# Altium PCB PCB.PcbDoc
Units mm, origin at the board's own origin, x right, y up, seen from the top; angles counter-clockwise.
Board outline 60.71 x 40 mm, 4 copper layers (Top Layer, GND, Power, Bottom Layer), stack 2.077 mm thick; 18 components, 19 nets, 85 pads, 201 vias.
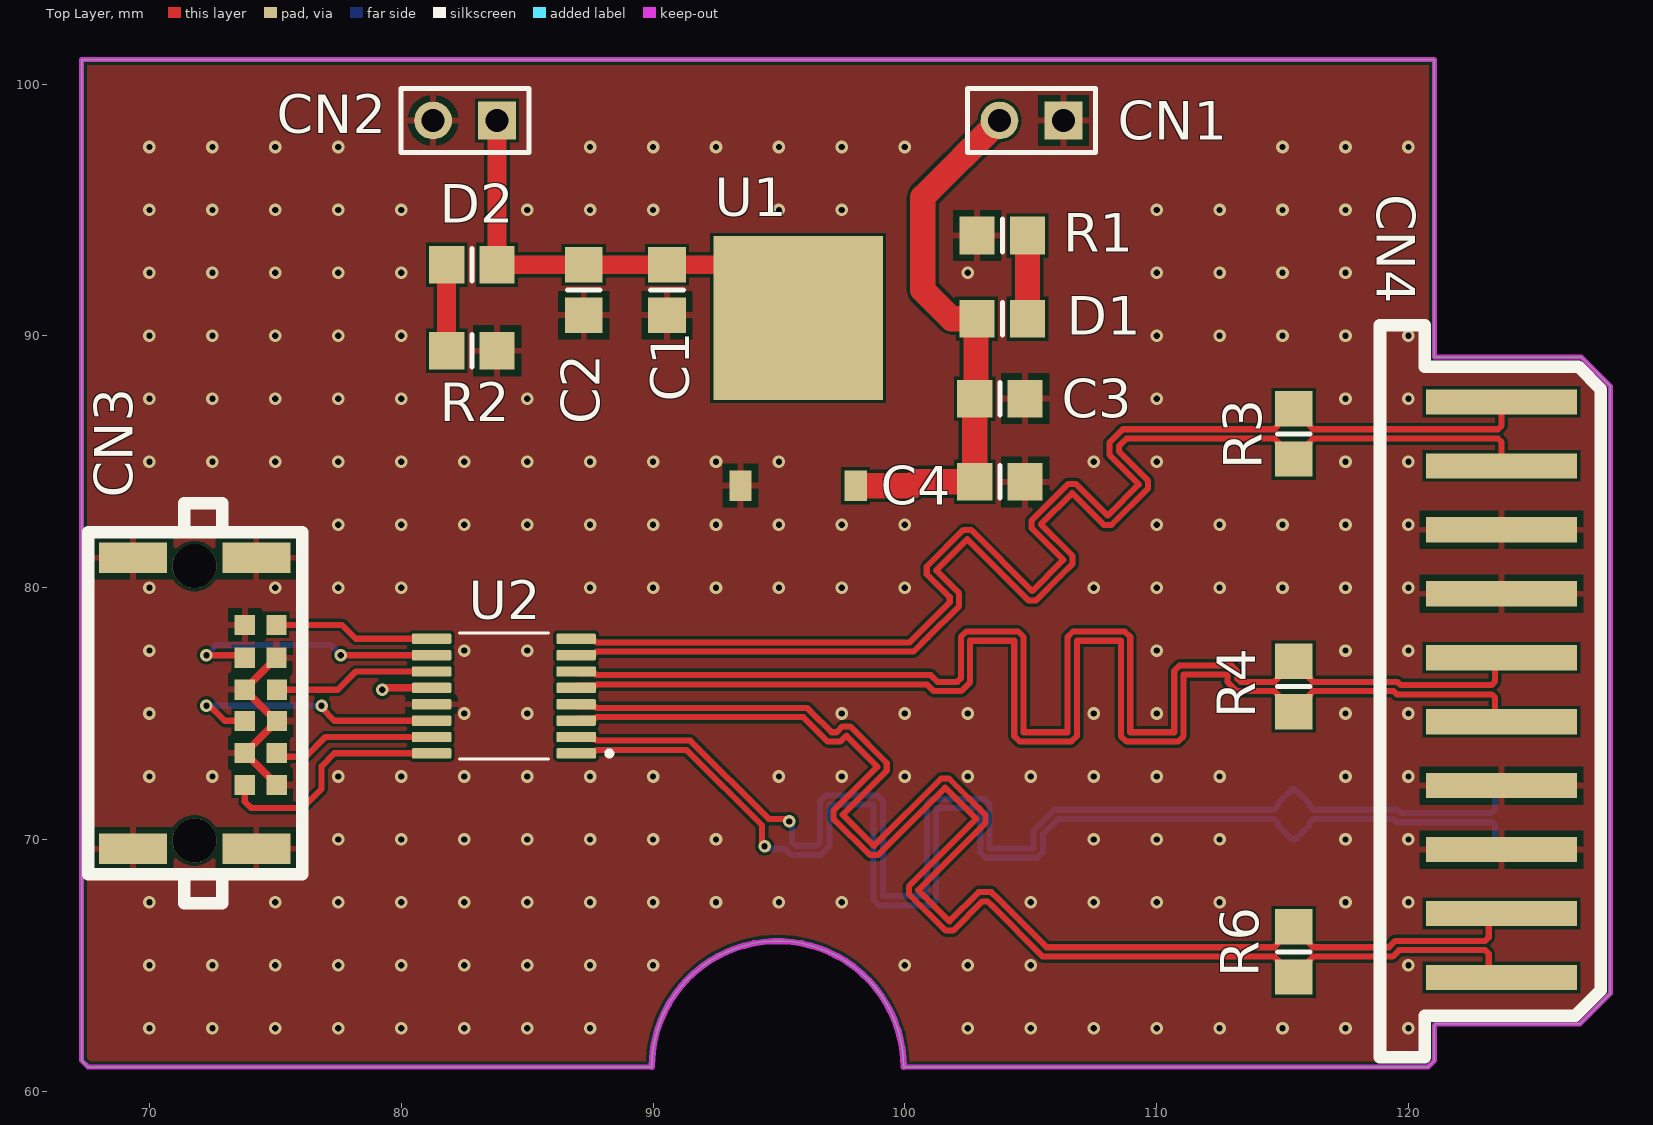
[diagram p0: Top Layer view]
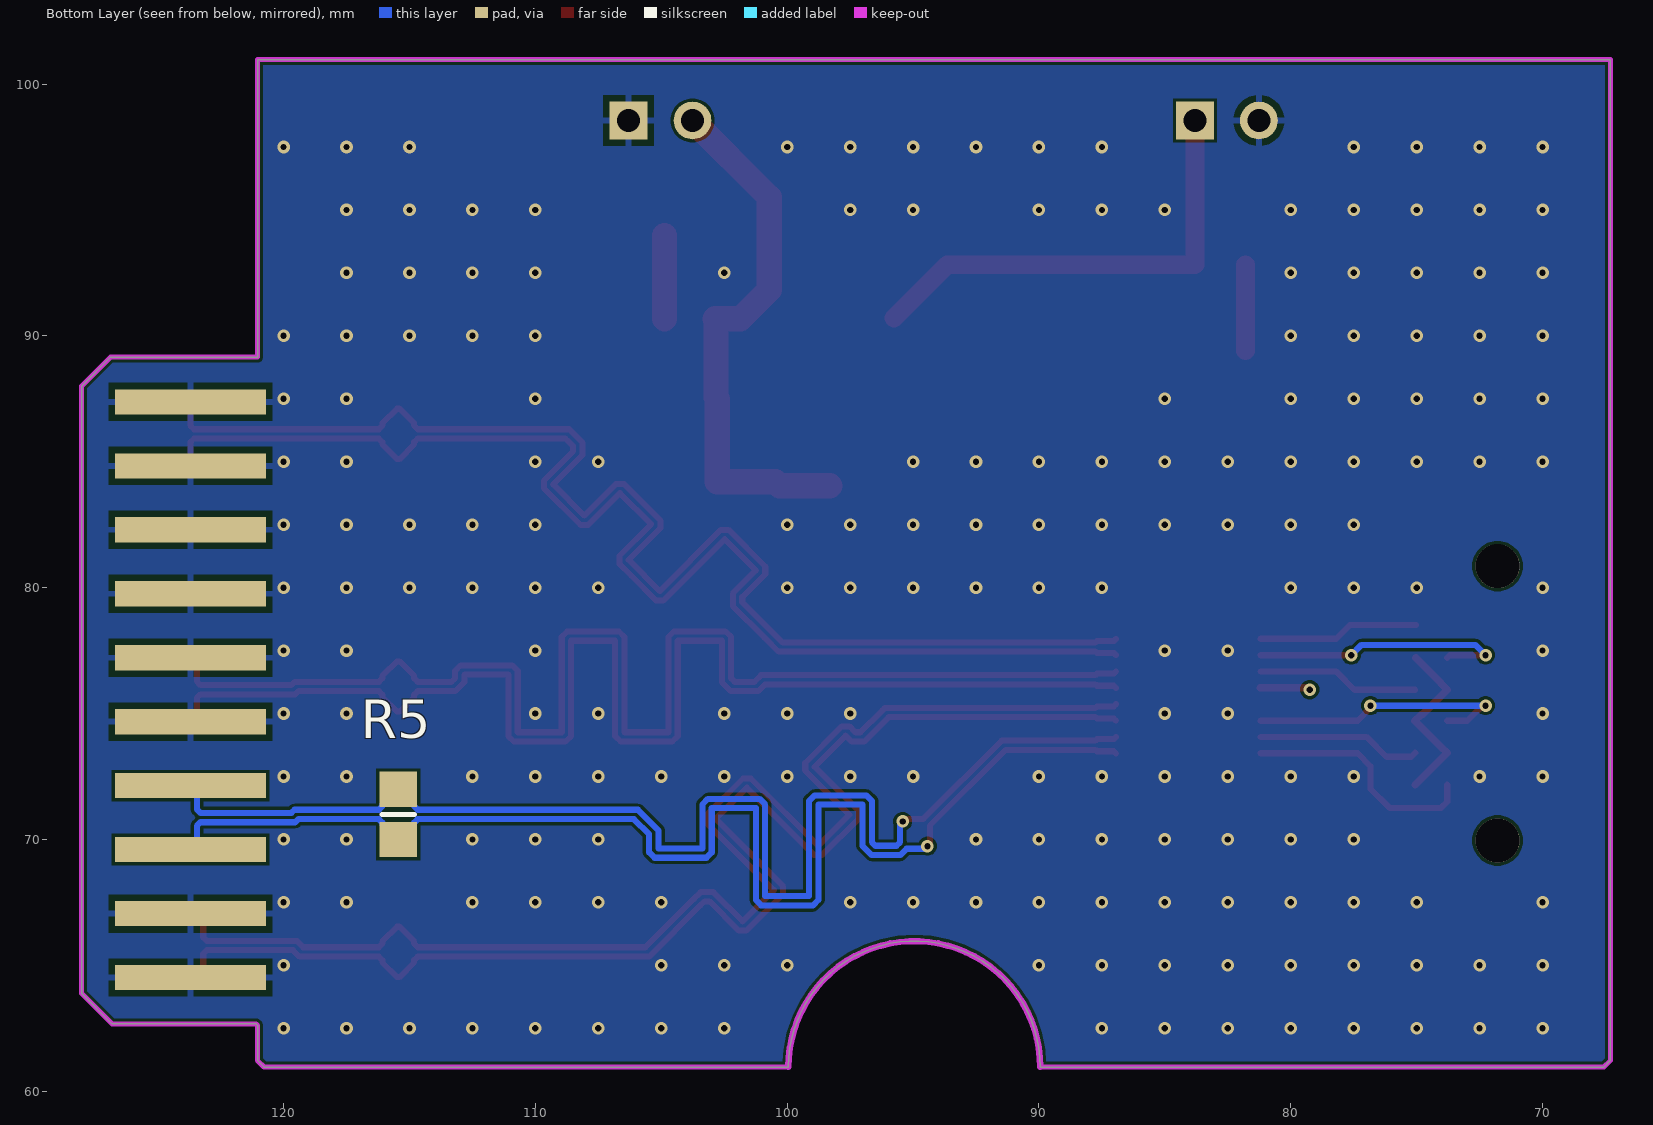
[diagram p1: Bottom Layer view, seen from below]
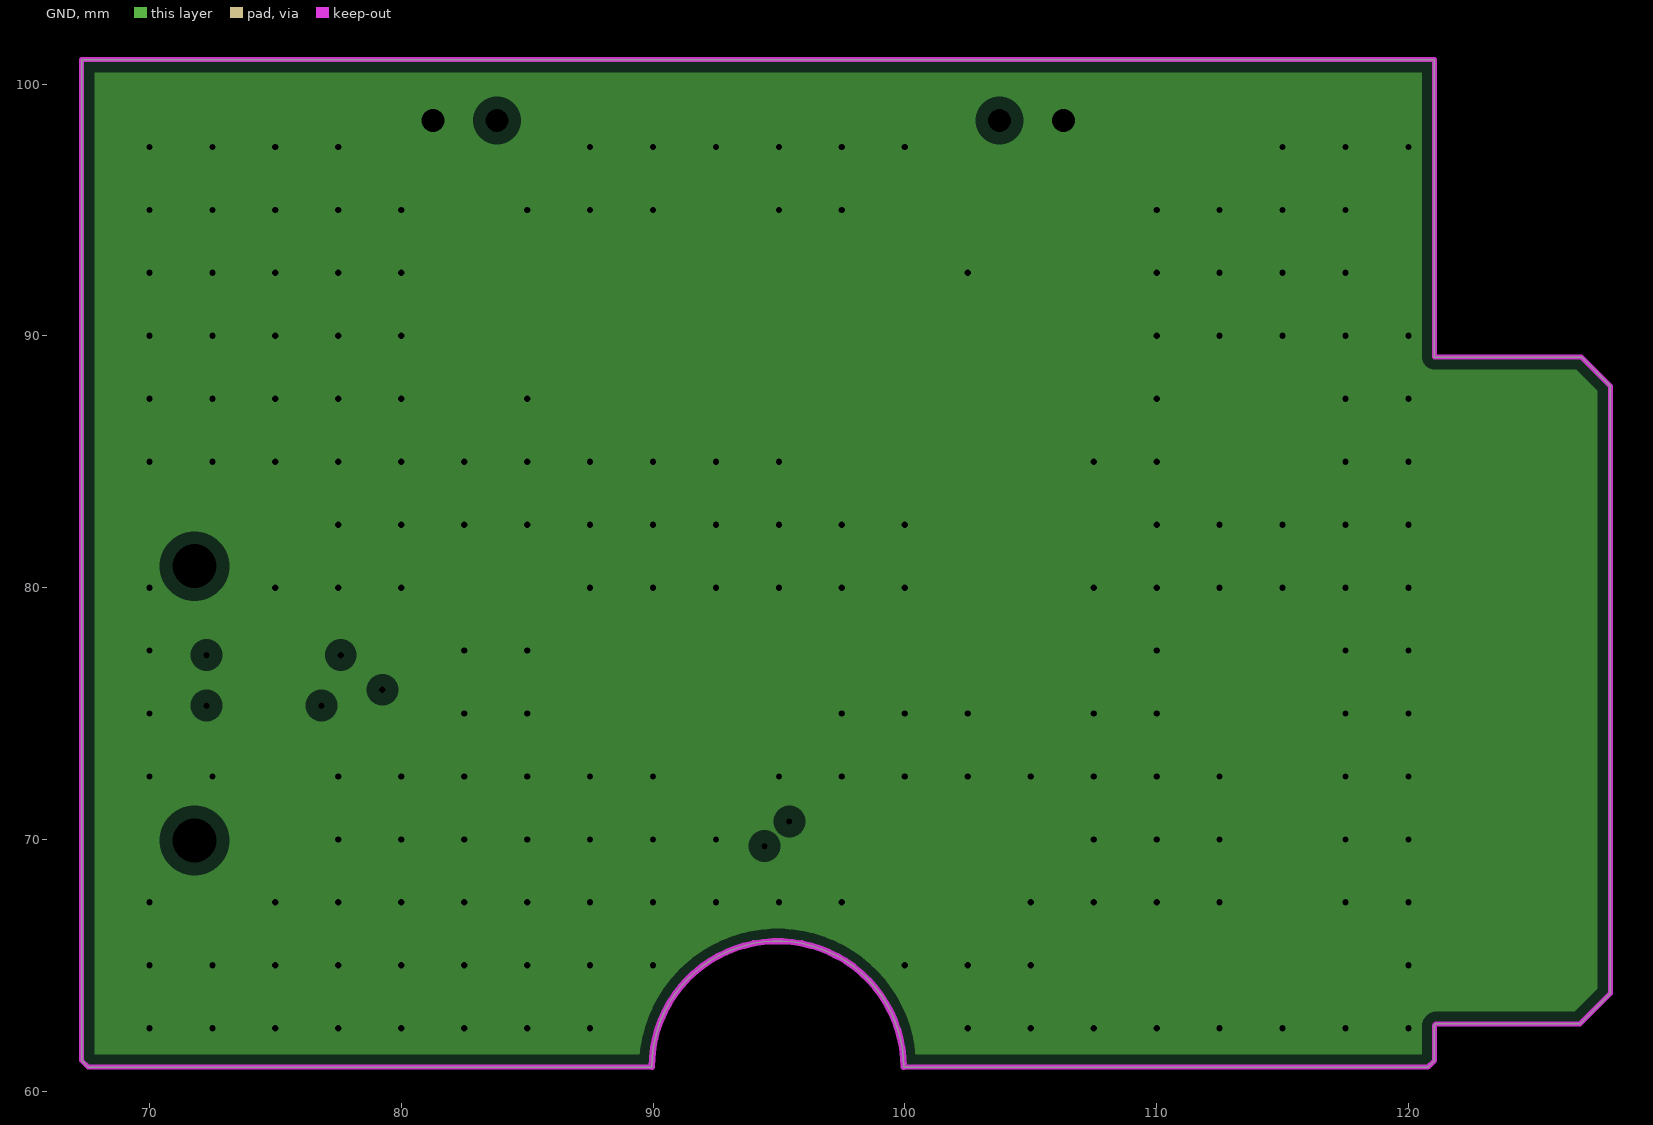
[diagram p2: GND, clearances drawn from the general rule]
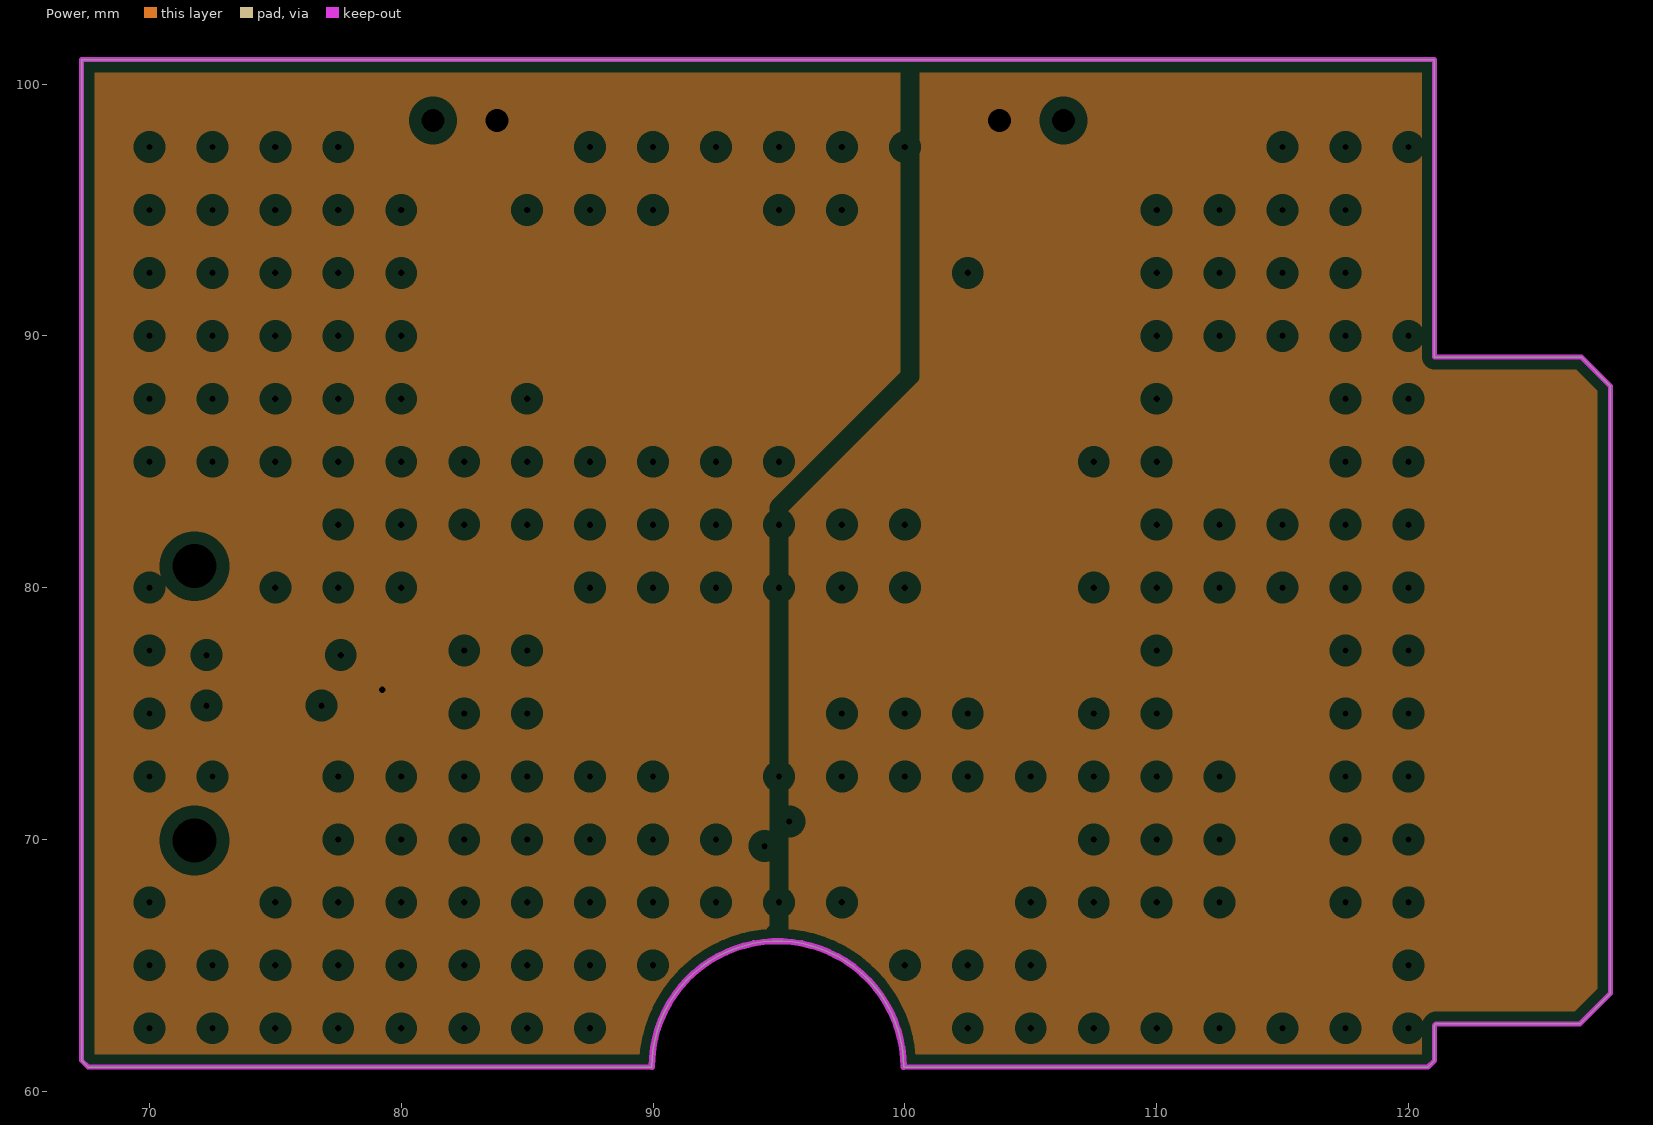
[diagram p3: Power, clearances drawn from the general rule]

## Layer stack, top to bottom
Top Solder: solder mask 0.0102, Solder Resist, Dk 3.5
Top Layer: signal copper 0.0356
Dielectric 2: prepreg 0.2184, PP-023, Dk 4.5
GND: plane copper 0.035, net GND
Dielectric 1: core 1.4986, Core-043, Dk 4.3
Power: plane copper 0.035, net (Multiple Nets)
Dielectric 3: prepreg 0.2184, PP-023, Dk 4.5
Bottom Layer: signal copper 0.0356
Bottom Solder: solder mask 0.0102, Solder Resist, Dk 3.5

## Board outline
67.564,60.96 89.949,60.96 cw(c94.949,60.96) 99.949,60.96 120.777,60.96 121.031,61.214 121.031,62.611 121.094,62.674 126.809,62.674 128.016,63.881 128.016,88.011 126.873,89.154 121.031,89.154 121.031,100.965 67.31,100.965 67.31,61.214

## Design rules (kind name [scope] priority, off if disabled: settings)
Clearance [All] p1: gap=0.12 ignorepadtopadclearanceinfootprint=TRUE
DiffPairsRouting [All] p1: maxlimit=0.127 minlimit=0.127 mostfreqgap=0.127 toplayer_minwidth=0.242 toplayer_maxwidth=0.242 toplayer_prefwidth=0.242 bottomlayer_minwidth=0.242 bottomlayer_maxwidth=0.242 bottomlayer_prefwidth=0.242 impedanceprofiledriven=TRUE impedanceprofileid={875D5F65-9E67-4446-8E94-E46B51120798} impedanceprofilevalue=90.000000 maxuncoupledlength=12.7
PlaneClearance [All] p1: clearance=0.508
PlaneConnect [All] p1: planeconnectstyle=Direct reliefexpansion=0.508 reliefentries=4 reliefconductorwidth=0.254 reliefairgap=0.254
PolygonConnect [All] p1: connectstyle=Relief reliefconductorwidth=0.254 reliefentries=4 polygonreliefangle="90 Angle" airgapwidth=0.254
RoutingVias [All] p1: holewidth=0.711 width=1.27 viastyle="Through Hole" minholewidth=0.711 minwidth=1.27 maxholewidth=0.711 maxwidth=1.27
SolderMaskExpansion [All] p1: expansion=0.102 istentingtop=FALSE
Width "Schematic Width Constraint_7" [InNet('5VDC')] p1: maxlimit=1 minlimit=1 preferedwidth=1
Width [InNet('No Net')] p2: maxlimit=3 minlimit=0.25 preferedwidth=1
27 further rules are at their usual default settings.

## Classes and differential pairs
differential pair D2: +D2_P -D2_N
differential pair R2: +R2_P -R2_N
differential pair R1: +R1_P -R1_N
differential pair D1: +D1_P -D1_N

## Components (designator, comment, footprint, x,y, rotation, side; value= is the part's Value field where it differs from the comment)
C1 "Cap" 6-0805_M 90.551,91.821 r90 top value=100nF
C2 "Cap" 6-0805_M 87.249,91.821 r90 top value=1uF
C3 "Cap" 6-0805_M 103.775,87.503 r180 top value=100nF
C4 "Cap" 6-0805_M 103.775,84.201 r180 top value=1uF
CN1 "Header 2" HDR1X2 106.299,98.552 r180 top
CN2 "Header 2" HDR1X2 83.804,98.552 r180 top
CN3 "M55-10P" 2TH-14SMT 72.009,74.707 r270 top locked
CN4 "SMT-20OPin-2.54P" SMT-20OPin-2.54P 123.317,76.073 r90 top locked
D1 "LED1" 6-0805_M 103.87,90.678 r0 top
D2 "LED1" 6-0805_M 82.804,92.821 r180 top
R1 "Res1" 6-0805_M 103.87,93.98 r0 top value=220R
R2 "Res1" 6-0805_M 82.804,89.408 r180 top value=150R
R3 "Res1" 6-0805_M 115.443,86.106 r270 top value=100R
R4 "Res1" 6-0805_M 115.443,76.073 r90 top value=100R
R5 "Res1" 6-0805_M 115.443,70.993 r90 bottom value=100R
R6 "Res1" 6-0805_M 115.443,65.532 r270 top value=100R
U1 "LM1117DT-3.3/NOPB" TO228P970X238-3N 95.758,90.551 r0 top
U2 "DS90LV049QMT" SOP65P640X120-16N 84.074,75.692 r180 top locked

## Footprints (in the part's own frame and the unit in brackets; to place one, negate y for a bottom-side part, rotate by r counter-clockwise, add the part's x,y. Pads: shape width x height; smd on the part's side, far side on the other; paste and mask are expansions set on the pad)
2TH-14SMT [mm]
  rect 0.8x0.8 smd: 1(2.54,1.778) 2(1.27,1.778) 3(0,1.778) 4(-1.239,1.778) 5(-2.509,1.778) 6(-3.81,1.778) 7(2.54,3.048) 8(1.27,3.048) 9(0,3.06) 10(-1.239,3.06) 11(-2.509,3.031) 12(-3.81,3.031)
  rect 1.2x2.7 smd: 13(-6.477,2.233) 14(-6.477,-2.667) 15(5.08,2.233) 16(5.08,-2.667)
  round 1.75 hole 1.75: PAD(-6.147,-0.222) PAD(4.75,-0.222)
  silkscreen extent -8.64,-4.45 7.24,4.06, body extent -6.99,-6.6 5.71,3.4, height 4.2
6-0805_M [mm] "Chip Resistor, Body 2.0x1.2mm, IPC Low Density"
  rect 1.4x1.5 smd: 1(-1,0) 2(1,0)
  silkscreen extent 0,-0.65 0,0.65, body extent -1.07,-0.7 1.07,0.7, height 0.7
HDR1X2 [mm] "Connector; Header; 2 Position"
  rect 1.5x1.5 hole 0.9: 1(0,0)
  round 1.5 hole 0.9: 2(2.54,0)
  silkscreen extent -1.27,-1.27 3.81,1.27
SMT-20OPin-2.54P [mm]
  rect 1x6 smd: 1(-11.557,-0.381) 2(-9.017,-0.381) 3(-6.477,-0.381) 4(-3.937,-0.381) 5(-1.397,-0.381) 6(1.143,-0.381) 7(3.683,-0.381) 8(6.223,-0.381) 9(8.763,-0.381) 10(11.303,-0.381)
  rect 1x6 smd far side: 11(11.303,-0.381) 12(8.763,-0.381) 13(6.223,-0.381) 14(3.683,-0.381) 15(1.143,-0.381) 16(-1.397,-0.381) 17(-3.937,-0.381) 18(-6.477,-0.381) 19(-9.017,-0.381) 20(-11.557,-0.381)
  silkscreen extent -14.73,-4.32 14.35,4.45
SOP65P640X120-16N [mm]
  rrect25% 1.57x0.41 smd: 1(-2.87,2.275) 2(-2.87,1.625) 3(-2.87,0.975) 4(-2.87,0.325) 5(-2.87,-0.325) 6(-2.87,-0.975) 7(-2.87,-1.625) 8(-2.87,-2.275) 9(2.87,-2.275) 10(2.87,-1.625) 11(2.87,-0.975) 12(2.87,-0.325) 13(2.87,0.325) 14(2.87,0.975) 15(2.87,1.625) 16(2.87,2.275)
  silkscreen extent -4.29,-2.5 1.77,2.5
TO228P970X238-3N [mil]
  rect 35x48 smd: 1(-90,-256) 3(90,-256)
  rect 265x256 smd: 2(0,6)

## Part data
C1 C2 C3 C4: "Capacitor", LatestRevisionDate=17-Jul-2002, LatestRevisionNote="Re-released for DXP Platform.", PackageDescription="Radial Cap, Thru-Hole; 2 Leads; 0.3 in Pin Spacing", PackageReference=RAD-0.3, Published=8-Jun-2000, Publisher="Altium Limited"
CN1 CN2: "Header, 2-Pin", LatestRevisionDate=17-Jul-2002, LatestRevisionNote="Re-released for DXP Platform.", Publisher="Altium Limited"
CN3: library part M55-7101286646, "10 Position SMD Connector"
D1 D2: "Typical RED GaAs LED", LatestRevisionDate=08-Jul-2005, LatestRevisionNote="Mech Layer 1 removed.", PackageDescription="LED; 2 Leads", PackageReference=LED-1, Published=8-Jun-2000, Publisher="Altium Limited"
R1 R2 R3 R4 R5 R6: "Resistor", LatestRevisionDate=17-Jul-2002, LatestRevisionNote="Re-released for DXP Platform.", PackageDescription="Axial Device, Thru-Hole; 2 Leads; 0.3 in Pin Spacing", PackageReference=AXIAL-0.3, Published=8-Jun-2000, Publisher="Altium Limited"
U1: "Linear Voltage Regulator IC 1 Output 800mA TO-252-3", Package=None, Availability=Unavailable, MF="Texas Instruments", MP=LM1117DT33, Price=None, SnapEDA_Link=https://www.snapeda.com/parts/LM1117DT33/Texas%20Instruments/view-part/19360/?ref=snap
U2: "Automotive LVDS Dual High-Speed Differential Transceiver 16-TSSOP -40 to 125", Package="TSSOP-16 Texas Instruments", Availability=Warning, DigiKey-Purchase-URL=https://snapeda.com/shop?store=DigiKey&id=15994, MF="Texas Instruments", Mouser-Purchase-URL=https://snapeda.com/shop?store=Mouser&id=15994, MP=DS90LV049QMT/NOPB, Price=None, SnapEDA_Link=https://www.snapeda.com/parts/DS90LV049QMT/NOPB/Texas%20Instruments/view-part/15994/?ref=snap, Texas_Instruments-Purchase-URL=https://snapeda.com/shop?store=Texas+Instruments&id=15994

## Via types
v1: diameter 0.5, hole 0.25, Top Layer to Bottom Layer, tented both sides, 201 vias

## Nets (pads, with @x,y where several pads share a name; then routed paths per layer and width w, separated by ;. In a path a pad name is that pad's centre, name@x,y a point inside that pad or via, vN(x,y) a via of type N, cw(c..) or ccw(c..) an arc to the next point about the centre after c; other vN are vias at no path point)
3.3VDC: C1.2 C2.2 CN2.1 D2.1 U1.2 U2.12 | length 20.5
  Top Layer w0.3: v1(79.248,75.946) 79.319,76.017 U2.12
  Top Layer w0.75: CN2.1 D2.1 C2.2 C1.2 93.64,92.821 U1.2
5VDC: C3.2 C4.2 CN1.2 D1.1 U1.3 | length 21.7
  Top Layer w1: U1.3@98.298,84.049 100.305,84.049 100.457,84.201 C4.2 C3.2 102.822,87.551 102.822,90.63 D1.1 101.854,90.678 100.711,91.821 100.711,95.504 CN1.2
D1_N: CN4.10 R3.1 U2.8 | length 55
  Top Layer w0.242: U2.8 87.028,77.883 87.693,77.883 87.75,77.827 100.191,77.827 100.654,78.289 101.784,79.419 101.784,79.62 100.872,80.532 100.872,80.838 102.325,82.291 102.631,82.291 105.058,79.865 106.295,81.102 105.034,82.363 105.034,82.669 106.487,84.123 106.793,84.123 108.055,82.861 109.292,84.099 108.131,85.26 108.131,85.766 108.401,86.036 108.655,86.291 114.672,86.291 114.814,86.432 114.814,86.527 115.393,87.106 R3.1 115.493,87.106 116.072,86.527 116.072,86.432 116.214,86.291 123.556,86.291 123.698,86.432 CN4.10
  Top Layer w0.381: CN4.10@121.302,87.376 CN4.10
D1_P: CN4.9 R3.2 U2.7 | length 55
  Top Layer w0.242: U2.7 87.028,77.401 87.693,77.401 87.75,77.458 100.344,77.458 100.915,78.028 102.153,79.266 102.153,79.773 101.241,80.685 102.478,81.922 104.905,79.496 105.211,79.496 106.176,80.461 106.664,80.949 106.664,81.255 105.403,82.516 106.64,83.754 107.902,82.492 108.207,82.492 109.661,83.946 109.661,84.252 108.5,85.413 108.5,85.613 108.662,85.775 ; 108.662,85.775 108.808,85.921 114.672,85.921 114.814,85.78 114.814,85.685 115.393,85.106 R3.2 115.493,85.106 116.072,85.685 116.072,85.78 116.214,85.921 123.556,85.921 123.698,85.78 CN4.9
  Top Layer w0.381: CN4.9@121.302,84.836 CN4.9
D2_N: CN4.5 R4.1 U2.5 | length 55
  Top Layer w0.242: U2.5 87.028,76.101 87.693,76.101 87.75,76.157 100.875,76.157 101.144,75.888 101.854,75.888 102.236,75.888 102.594,76.246 102.594,77.889 104.344,77.889 104.344,74.105 104.56,73.888 106.616,73.888 106.832,74.105 106.832,77.889 108.582,77.889 108.582,74.105 108.798,73.888 110.854,73.888 111.07,74.105 111.07,76.543 112.82,76.543 112.82,76.246 113.178,75.888 114.389,75.888 114.672,75.888 114.814,75.747 114.814,75.652 115.393,75.073 R4.1 115.493,75.073 116.072,75.652 116.072,75.747 116.214,75.888 119.412,75.888 119.539,75.761 123.302,75.761 123.444,75.62 123.444,74.93 CN4.5
D2_P: CN4.6 R4.2 U2.6 | length 55
  Top Layer w0.242: U2.6 87.028,76.583 87.693,76.583 87.75,76.526 101.027,76.526 101.296,76.258 101.854,76.258 102.083,76.258 102.225,76.399 102.225,78.041 102.441,78.258 104.497,78.258 104.713,78.041 104.713,74.257 106.463,74.257 106.463,78.041 106.679,78.258 108.735,78.258 108.951,78.041 108.951,74.257 110.701,74.257 110.701,76.696 110.917,76.912 112.973,76.912 113.189,76.696 113.189,76.399 113.331,76.258 114.389,76.258 114.672,76.258 114.814,76.399 114.814,76.494 115.393,77.073 R4.2 115.493,77.073 116.072,76.494 116.072,76.399 116.214,76.258 119.565,76.258 119.692,76.131 123.302,76.131 123.444,76.272 123.444,76.962 CN4.6
GND: C1.1 C2.1 C3.1 C4.1 CN1.1 CN2.2 CN3.2 CN3.4 CN3.6 CN3.7 CN3.9 CN3.11 CN3.13 CN3.14 CN3.15 CN3.16 CN4.3 CN4.4 CN4.7 CN4.8 CN4.11 CN4.12 CN4.13 CN4.14 CN4.15 CN4.16 CN4.19 CN4.20 R1.1 R2.1 U1.1 U2.13 | length 7.2
  Top Layer w0.3: CN3.11 74.037,76.213 74.037,76.196 CN3.4 74.776,74.957 74.819,74.957 CN3.9 74.049,73.687 74.037,73.687 CN3.2 CN3.7
  other v1: 70,62.5 72.5,62.5 75,62.5 77.5,62.5 80,62.5 82.5,62.5 85,62.5 87.5,62.5 102.5,62.5 105,62.5 107.5,62.5 110,62.5 112.5,62.5 115,62.5 117.5,62.5 120,62.5 70,65 72.5,65 75,65 77.5,65 80,65 82.5,65 85,65 87.5,65 90,65 100,65 102.5,65 105,65 120,65 70,67.5 75,67.5 77.5,67.5 80,67.5 82.5,67.5 85,67.5 87.5,67.5 90,67.5 92.5,67.5 95,67.5 97.5,67.5 105,67.5 107.5,67.5 110,67.5 112.5,67.5 117.5,67.5 120,67.5 77.5,70 80,70 82.5,70 85,70 87.5,70 90,70 92.5,70 107.5,70 110,70 112.5,70 117.5,70 120,70 70,72.5 72.5,72.5 77.5,72.5 80,72.5 82.5,72.5 85,72.5 87.5,72.5 90,72.5 95,72.5 97.5,72.5 100,72.5 102.5,72.5 105,72.5 107.5,72.5 110,72.5 112.5,72.5 117.5,72.5 120,72.5 70,75 82.5,75 85,75 97.5,75 100,75 102.5,75 107.5,75 110,75 117.5,75 120,75 70,77.5 82.5,77.5 85,77.5 110,77.5 117.5,77.5 120,77.5 70,80 75,80 77.5,80 80,80 87.5,80 90,80 92.5,80 95,80 97.5,80 100,80 107.5,80 110,80 112.5,80 115,80 117.5,80 120,80 77.5,82.5 80,82.5 82.5,82.5 85,82.5 87.5,82.5 90,82.5 92.5,82.5 95,82.5 97.5,82.5 100,82.5 110,82.5 112.5,82.5 115,82.5 117.5,82.5 120,82.5 70,85 72.5,85 75,85 77.5,85 80,85 82.5,85 85,85 87.5,85 90,85 92.5,85 95,85 107.5,85 110,85 117.5,85 120,85 70,87.5 72.5,87.5 75,87.5 77.5,87.5 80,87.5 85,87.5 110,87.5 117.5,87.5 120,87.5 70,90 72.5,90 75,90 77.5,90 80,90 110,90 112.5,90 115,90 117.5,90 120,90 70,92.5 72.5,92.5 75,92.5 77.5,92.5 80,92.5 102.5,92.5 110,92.5 112.5,92.5 115,92.5 117.5,92.5 70,95 72.5,95 75,95 77.5,95 80,95 85,95 87.5,95 90,95 95,95 97.5,95 110,95 112.5,95 115,95 117.5,95 70,97.5 72.5,97.5 75,97.5 77.5,97.5 87.5,97.5 90,97.5 92.5,97.5 95,97.5 97.5,97.5 100,97.5 115,97.5 117.5,97.5 120,97.5
NetCN3_1: CN3.1 U2.16 | length 9.6
  Top Layer w0.25: CN3.1 73.787,71.501 74.041,71.247 76.073,71.247 76.835,72.009 76.835,72.909 77.343,73.417 U2.16
NetCN3_3: CN3.3 U2.14 | length 11.1
  Top Layer w0.25: v1@72.263,75.438 72.994,74.707 CN3.3 ; v1(76.835,75.311) 76.835,75.225 77.343,74.717 U2.14
  Bottom Layer w0.25: v1@72.258,75.311 v1(76.835,75.311)
  other v1: 72.263,75.311
NetCN3_5: CN3.5 U2.10 | length 10.8
  Top Layer w0.25: v1(72.263,77.317) 73.686,77.317 CN3.5 ; v1(77.597,77.317) U2.10
  Bottom Layer w0.25: v1(72.263,77.317) 72.67,77.724 77.19,77.724 v1(77.597,77.317)
NetCN3_8: CN3.8 U2.15 | length 6.5
  Top Layer w0.25: CN3.8 75.215,73.279 76.2,73.279 76.988,74.067 U2.15
NetCN3_10: CN3.10 U2.11 | length 6.4
  Top Layer w0.25: CN3.10 77.471,75.946 78.192,76.667 U2.11
NetCN3_12: CN3.12 U2.9 | length 6.4
  Top Layer w0.25: CN3.12 77.641,78.517 78.192,77.967 U2.9
NetD1_2: D1.2 R1.2 | length 3.3
  Top Layer w1: D1.2 R1.2
NetD2_2: D2.2 R2.2 | length 3.4
  Top Layer w0.75: R2.2 D2.2
R1_N: CN4.18 R5.1 U2.1 | length 53
  Top Layer w0.242: U2.1 87.028,73.501 87.693,73.501 87.75,73.557 91.326,73.557 94.327,70.556 94.327,69.834 v1(94.43,69.731)
  Bottom Layer w0.242: v1(94.43,69.731) 94.533,69.629 95.255,69.629 95.505,69.379 96.266,69.379 96.648,69.379 97.006,69.737 97.006,71.379 98.756,71.379 98.756,67.595 98.972,67.379 101.028,67.379 101.244,67.595 101.244,71.24 102.994,71.24 102.994,69.487 103.21,69.271 105.266,69.271 105.482,69.487 105.482,70.207 106.084,70.808 106.68,70.808 114.672,70.808 114.814,70.667 114.814,70.572 115.393,69.993 R5.1 115.493,69.993 116.072,70.572 116.072,70.667 116.214,70.808 119.412,70.808 119.539,70.681 123.302,70.681 123.444,70.54 123.444,69.85 CN4.18
R1_P: CN4.17 R5.2 U2.2 | length 53
  Top Layer w0.242: U2.2 87.028,73.983 87.693,73.983 87.75,73.926 91.479,73.926 94.588,70.817 95.31,70.817 v1(95.413,70.714)
  Bottom Layer w0.242: v1(95.413,70.714) 95.516,70.612 95.516,69.89 95.657,69.748 96.266,69.748 96.495,69.748 96.637,69.89 96.637,71.532 96.853,71.748 98.909,71.748 99.125,71.532 99.125,67.748 100.875,67.748 100.875,71.393 101.091,71.609 103.147,71.609 103.363,71.393 103.363,69.64 105.113,69.64 105.113,70.36 105.931,71.178 106.68,71.178 114.672,71.178 114.814,71.319 114.814,71.414 115.393,71.993 R5.2 115.493,71.993 116.072,71.414 116.072,71.319 116.214,71.178 119.565,71.178 119.692,71.051 123.302,71.051 123.444,71.192 123.444,71.882 CN4.17
R2_N: CN4.2 R6.1 U2.4 | length 55
  Top Layer w0.242: U2.4 87.028,75.283 87.693,75.283 87.75,75.227 96.117,75.227 96.225,75.118 97.089,74.255 97.29,74.255 97.523,74.488 97.829,74.488 99.282,73.034 99.282,72.729 97.534,70.981 98.772,69.744 101.447,72.419 101.753,72.419 103.207,70.966 103.207,70.66 100.531,67.984 101.769,66.747 102.93,67.908 103.436,67.908 103.706,67.638 105.627,65.717 114.672,65.717 114.814,65.858 114.814,65.953 115.393,66.532 R6.1 115.493,66.532 116.072,65.953 116.072,65.858 116.214,65.717 119.221,65.717 119.475,65.971 123.048,65.971 123.19,66.112 123.19,66.677 123.569,67.056 CN4.2
R2_P: CN4.1 R6.2 U2.3 | length 55
  Top Layer w0.242: U2.3 87.028,74.801 87.693,74.801 87.75,74.858 95.964,74.858 96.936,73.886 97.442,73.886 97.676,74.119 98.913,72.882 97.165,71.134 97.165,70.828 98.619,69.375 98.925,69.375 101.6,72.05 102.838,70.813 100.162,68.137 100.162,67.831 101.616,66.378 101.921,66.378 103.083,67.539 103.283,67.539 103.445,67.377 105.474,65.347 114.672,65.347 114.814,65.206 114.814,65.111 115.393,64.532 R6.2 115.493,64.532 116.072,65.111 116.072,65.206 116.214,65.347 119.374,65.347 119.628,65.601 123.048,65.601 123.19,65.46 123.19,64.895 123.569,64.516 CN4.1
pads on no net: CN3.PAD

## Polygon pours and split planes (outlines as drawn)
GND on Bottom Layer "GND_L04_P001" (solid, remove dead copper, pour order 1): 60.578,104.394 125.222,104.394 129.794,99.822 129.794,58.547 125.476,54.229 123.698,56.007 60.578,56.007
GND on Top Layer "GND_L01_P000" (solid, remove dead copper, pour order 0): 63.817,102.362 130.302,102.362 133.604,99.06 132.842,98.298 132.842,63.119 125.857,56.134 63.689,56.134
3.3VDC on Power (split plane): 99.826,100.457 99.826,88.548 94.73,83.451 94.683,83.394 94.648,83.329 94.626,83.259 94.619,83.185 94.619,66.577 94.603,66.56 94.556,66.503 94.524,66.444 94.286,66.422 93.957,66.372 93.632,66.303 93.312,66.213 92.998,66.105 92.691,65.978 92.392,65.832 92.102,65.669 91.823,65.488 91.555,65.291 91.3,65.079 91.058,64.851 90.83,64.609 90.618,64.354 90.421,64.086 90.24,63.807 90.077,63.517 89.931,63.218 89.804,62.911 89.696,62.597 89.606,62.277 89.537,61.952 89.487,61.623 89.472,61.462 67.812,61.462 67.812,100.463 99.827,100.463
5VDC on Power (split plane): 120.529,89.154 120.538,89.056 120.567,88.962 120.613,88.875 120.676,88.799 120.752,88.736 120.839,88.69 120.933,88.661 121.031,88.652 126.665,88.652 127.514,87.803 127.514,64.089 126.601,63.177 121.094,63.177 120.996,63.167 120.902,63.139 120.815,63.092 120.739,63.03 120.676,62.966 120.613,62.89 120.567,62.803 120.538,62.709 120.529,62.611 120.529,61.462 100.426,61.462 100.411,61.623 100.361,61.952 100.292,62.277 100.202,62.597 100.094,62.911 99.967,63.218 99.821,63.517 99.658,63.807 99.477,64.086 99.28,64.354 99.068,64.609 98.84,64.851 98.598,65.079 98.343,65.291 98.075,65.488 97.796,65.669 97.506,65.832 97.207,65.978 96.9,66.105 96.586,66.213 96.266,66.303 95.941,66.372 95.612,66.422 95.373,66.444 95.373,83.029 100.469,88.126 100.516,88.183 100.551,88.248 100.556,88.264 100.573,88.318 100.58,88.392 100.58,100.457 100.579,100.463 120.529,100.463
GND on GND (split plane): 120.529,89.154 120.538,89.056 120.567,88.962 120.613,88.875 120.676,88.799 120.752,88.736 120.839,88.69 120.933,88.661 121.031,88.652 126.665,88.652 127.514,87.803 127.514,64.089 126.601,63.177 121.094,63.177 120.996,63.167 120.902,63.139 120.815,63.092 120.739,63.03 120.676,62.966 120.613,62.89 120.567,62.803 120.538,62.709 120.529,62.611 120.529,61.462 100.426,61.462 100.411,61.623 100.361,61.952 100.292,62.277 100.202,62.597 100.094,62.911 99.967,63.218 99.821,63.517 99.658,63.807 99.477,64.086 99.28,64.354 99.068,64.609 98.84,64.851 98.598,65.079 98.343,65.291 98.075,65.488 97.796,65.669 97.506,65.832 97.207,65.978 96.9,66.105 96.586,66.213 96.266,66.303 95.941,66.372 95.612,66.422 95.281,66.452 94.949,66.463 94.617,66.452 94.286,66.422 93.957,66.372 93.632,66.303 93.312,66.213 92.998,66.105 92.691,65.978 92.392,65.832 92.102,65.669 91.823,65.488 91.555,65.291 91.3,65.079 91.058,64.851 90.83,64.609 90.618,64.354 90.421,64.086 90.24,63.807 90.077,63.517 89.931,63.218 89.804,62.911 89.696,62.597 89.606,62.277 89.537,61.952 89.487,61.623 89.472,61.462 67.812,61.462 67.812,100.463 120.529,100.463

## Keep-outs
Keep-Out Layer:
  lines w0.2: 89.949,60.96 67.564,60.96 67.31,61.214 67.31,84.709 67.31,100.965 121.031,100.965 121.031,89.154 126.873,89.154 128.016,88.011 128.016,63.881 126.809,62.674 121.094,62.674 121.031,62.611 121.031,61.214 120.777,60.96 99.949,60.96
  lines w0.254: 89.949,60.96 cw(c94.949,60.96) 99.949,60.96

## Other copper
Power (plane layer: these items are gaps in the copper):
  lines w0.75: 94.869,66.294 94.996,66.421 94.996,83.185 100.203,88.392 100.203,100.457